# EAGLE board VM_Motor_v2.0 (EAGLE 7.0.0)
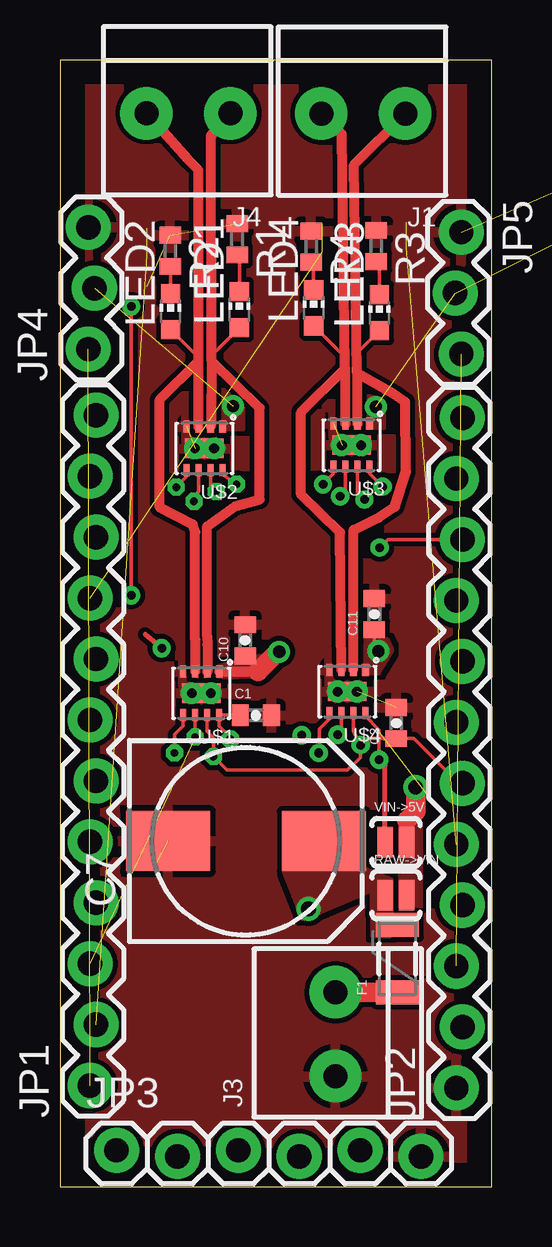
[diagram p0: board, top side]
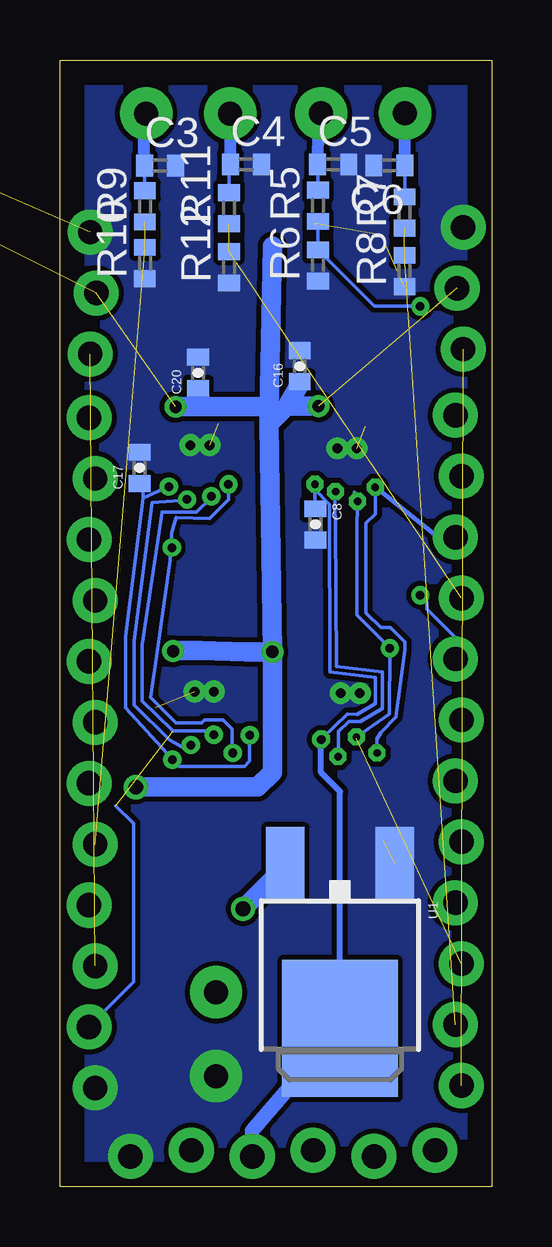
[diagram p1: board, bottom side, seen from below]

Size 18 x 46.97 mm. Coordinates in mm from the lower left corner, seen from the top.
Outline: 0,0 18,0 18,46.97 0,46.97 0,0
Copper layers (1*16): Top 0.035mm / dielectric 1.5mm / Bottom 0.035mm
Design rules "default": minimum track width 10mil, minimum drill 24mil, track to track 8mil, track to pad 8mil, pad to pad 8mil, via to via 8mil, smd to smd 8mil, copper to edge 40mil, drill to drill 8mil, minimum pad ring 10mil, minimum via ring 8mil, stop-mask expansion 4mil, vias tented up to drill 0mil, thermal gap 10mil

## Footprints (pad centres in the part's own frame; a part is rotated, then mirrored left to right if it is on the bottom)
0402-CAP = smd 0.7 x 0.9: 1 -0.65,0; 2 0.65,0
C0402 = smd 0.7 x 0.9: 1 -0.65,0; 2 0.65,0
150CLZ-0810 = smd 3.5 x 2.5: + 3.25,0; - -3.25,0
PTC-1206 = smd 1 x 1.8: 1 -1.4,0; 2 1.4,0
TERMBLOCK_1X2-3.5MM = drill 1 pad 2.184: 1 1.8,0; 2 -1.7,0
1X12_LOCK = drill 1.016 pad 1.88: 1 0,0.127; 2 2.54,-0.127; 3 5.08,0.127; 4 7.62,-0.127; 5 10.16,0.127; 6 12.7,-0.127; 7 15.24,0.127; 8 17.78,-0.127; 9 20.32,0.127; 10 22.86,-0.127; 11 25.4,0.127; 12 27.94,-0.127
1X06_LOCK = drill 1.016 pad 1.88: 1 0,0; 2 2.54,-0.254; 3 5.08,0; 4 7.62,-0.254; 5 10.16,0; 6 12.7,-0.254
1X03_LOCK = drill 1.016 pad 1.88: 1 0,0.127; 2 2.54,-0.127; 3 5.08,0.127
CHIP-LED0603 = smd 0.8 x 0.8: A 0,-0.75; C 0,0.75
R0402 = smd 0.7 x 0.9: 1 -0.65,0; 2 0.65,0
SJ_2S-NO = smd 0.635 x 1.27: 1 -0.45,0; 2 0.45,0
DPAK = smd 1.6 x 3: 1 -2.28,-5.31; 3 2.28,-5.31 | smd 4.826 x 5.715: 4 0,1.588
QFN8 = smd 0.28 x 0.5: P$1 -0.75,-0.9; P$2 -0.25,-0.9 | smd 0.25 x 0.5: P$3 0.25,-0.9; P$4 0.75,-0.9; P$5 0.75,0.9; P$6 0.25,0.9; P$7 -0.25,0.9; P$8 -0.75,0.9 | smd 1.6 x 0.8: P$9 0,0 | drill 0.4 pad 0.6: P$10 0.4,0; P$11 -0.4,0

## Placement (x,y rotation side)
C1  .1uF  [0402-CAP]  8.17,19.65 0 top
C2  .1uF  [0402-CAP]  14.03,19.32 90 top
C3  100nF  [C0402]  13.82,42.57 0 bottom
C4  100nF  [C0402]  10.24,42.62 0 bottom
C5  100nF  [C0402]  6.61,42.62 0 bottom
C6  100nF  [C0402]  4.26,42.58 180 bottom
C7  1000uF  [150CLZ-0810]  7.75,14.41 0 top
C8  .1uF  [0402-CAP]  7.35,27.61 270 bottom
C10  10uF  [0402-CAP]  7.73,22.78 90 top
C11  10uF  [0402-CAP]  13.11,23.87 90 top
C13  10uF  [0402-CAP]  33.99,50.44 90 top  (outside the outline)
C14  10uF  [0402-CAP]  33.99,46.63 90 top  (outside the outline)
C16  10uF  [0402-CAP]  8,34.21 90 bottom
C17  .1uF  [0402-CAP]  14.68,29.97 90 bottom
C20  10uF  [0402-CAP]  12.24,33.93 90 bottom
F1  PTCSMD  [PTC-1206]  14.07,9.51 90 top
J1  [TERMBLOCK_1X2-3.5MM]  12.7,44.74 180 top
J3  [TERMBLOCK_1X2-3.5MM]  11.49,6.31 90 top
J4  [TERMBLOCK_1X2-3.5MM]  5.41,44.75 180 top
JP1  M12LOCK  [1X12_LOCK]  1.38,4.22 90 top
JP2  M12LOCK  [1X12_LOCK]  16.66,4.12 90 top
JP3  [1X06_LOCK]  2.36,1.52 0 top
JP4  [1X03_LOCK]  1.31,34.92 90 top
JP5  [1X03_LOCK]  16.61,39.8 270 top
LED1  BLUE  [CHIP-LED0603]  7.48,36.56 0 top
LED2  GREEN  [CHIP-LED0603]  4.61,36.49 0 top
LED3  BLUE  [CHIP-LED0603]  13.32,36.44 0 top
LED4  GREEN  [CHIP-LED0603]  10.58,36.64 0 top
R1  [R0402]  7.39,39.5 270 top
R2  [R0402]  4.6,39.01 270 top
R3  [R0402]  13.19,39.22 270 top
R4  [R0402]  10.48,39.19 270 top
R5  [R0402]  7.24,40.89 90 bottom
R6  [R0402]  7.24,38.4 90 bottom
R7  [R0402]  3.63,40.61 90 bottom
R8  [R0402]  3.63,38.18 90 bottom
R9  [R0402]  14.45,40.87 90 bottom
R10  [R0402]  14.45,38.51 90 bottom
R11  [R0402]  10.95,40.79 90 bottom
R12  [R0402]  10.95,38.33 90 bottom
RAW->VIN  SOLDERJUMPERNO  [SJ_2S-NO]  14.01,12.16 0 top
U1  V_REG_MC33269DT  [DPAK]  6.32,8.19 180 bottom
U$1  DRV8837  [QFN8]  5.89,20.57 180 top
U$2  DRV8837  [QFN8]  6.03,30.78 180 top
U$3  DRV8837  [QFN8]  12.16,30.91 180 top
U$4  DRV8837  [QFN8]  11.99,20.64 180 top
VIN->5V  SOLDERJUMPERNO  [SJ_2S-NO]  14.01,14.36 0 top

## Library data of the parts
C1 C2 C8 C10 C11 C13 C14 C16 C17 C20 = SparkFun-Capacitors
C3-C7 R1-R12 = resistor
F1 = SparkFun-PowerIC; PROD_ID: RES-11150
J1 J3 J4 = microbuilder
JP1-JP5 = SparkFun-Connectors
LED1-LED4 = led
RAW->VIN VIN->5V = SparkFun-Retired
U1 = SparkFun-PowerIC
U$1-U$4 = bt_motordriver

## Nets
+5V: C1.1 C2.1 C8.1 C17.1 JP3.4 U1.4 U$1.P$8 U$2.P$8 U$3.P$8 U$4.P$8 VIN->5V.1
CTS_RES: JP3.5
DTR_SEL: JP3.1
GND: C1.2 C2.2 C3.2 C4.2 C5.2 C6.2 C7.- C8.2 C10.2 C11.2 C13.2 C14.2 C16.2 C17.2 C20.2 J3.2 JP2.1 JP3.6 JP4.3 JP5.1 R1.1 R2.1 R3.1 R4.1 R6.1 R8.1 R10.1 R12.1 U1.1 U$1.P$4 U$1.P$9 U$1.P$10 U$1.P$11 U$2.P$4 U$2.P$9 U$2.P$10 U$2.P$11 U$3.P$4 U$3.P$9 U$3.P$10 U$3.P$11 U$4.P$4 U$4.P$9 U$4.P$10 U$4.P$11
HM-RX: JP2.12
HM-TX: JP2.11
IO20: JP2.8
IO_02: JP2.9
IO_05-SDA: JP1.11
IO_06: JP1.7
IO_07: JP1.6
IO_08: JP1.5
IO_08-SCL: JP1.12
IO_09: JP1.4
IO_10: JP1.8 R5.1 R6.2
IO_011: JP1.1 JP4.1
IO_11: JP1.9 R11.1 R12.2
IO_13: JP2.3 JP5.3
IO_14: JP2.4
IO_15: JP2.7
IO_110: JP1.2 R7.1 R8.2
IO_111: JP2.5 R9.1 R10.2
MOTOR1_DIR: JP1.10 U$1.P$5 U$2.P$5
MOTOR1_PWM: JP1.3 U$1.P$6 U$2.P$6
MOTOR2_DIR: JP2.10 U$3.P$5 U$4.P$5
MOTOR2_PWM: JP2.2 U$3.P$6 U$4.P$6
MOUT1_A: C5.1 J4.2 LED1.A R5.2 U$1.P$2 U$2.P$2
MOUT1_B: C6.1 J4.1 LED2.A R7.2 U$1.P$3 U$2.P$3
MOUT2_A: C3.1 J1.2 LED3.A R9.2 U$3.P$2 U$4.P$2
MOUT2_B: C4.1 J1.1 LED4.A R11.2 U$3.P$3 U$4.P$3
N$1: LED2.C R2.2
N$2: LED4.C R4.2
N$3: LED1.C R1.2
N$4: LED3.C R3.2
N$13: F1.1 J3.1
RAW: C7.+ F1.2 RAW->VIN.1 U1.3
RX: JP3.3
SLEEP: JP2.6 U$1.P$7 U$2.P$7 U$3.P$7 U$4.P$7
TX: JP3.2
VIN: C10.1 C11.1 C13.1 C14.1 C16.1 C20.1 JP4.2 JP5.2 RAW->VIN.2 U$1.P$1 U$2.P$1 U$3.P$1 U$4.P$1 VIN->5V.2

## Tracks (layer width: path | path; a pad name or v marks a point on that pad's centre or on a via)
+5V  (via drill 0.3, 0.36 pad 0.36)
  Top 0.152: v7.09,18.67 7.09,18.77 6.64,19.21 U$1.P$8 7.5,19.68 C1.1 | U$2.P$8 6.78,29.7 v7.37,29.29 | U$4.P$8 12.74,19.62 13.31,19.05 13.31,18.87 | 13.31,18.87 v13.31,17.8 | U$3.P$8 12.91,29.74 v13.46,29.18 | v7.11,18.64 9.91,18.64 v10.08,18.82 | C2.1 13.51,18.68 13.31,18.87
  Top 0.203: VIN->5V.1 13.56,17.55 v13.31,17.8
  Bottom 0.152: 7.09,18.64 v7.09,18.67 6.02,19.71 5.61,19.68 4.85,20.14 4.85,21.23 6.73,21.46 6.76,28.45 7.37,29.06 v7.37,29.29 | v7.37,29.29 7.16,29.29 | v13.31,17.8 13.31,17.98 | 13.46,29.16 v13.46,29.18 14.53,28.7 | 14.53,28.7 15.27,22.96 15.27,19.96 v13.31,17.8 | v10.08,18.82 10.08,17.75 10.31,17.53 13.03,17.53 v13.31,17.8 | v7.37,29.29 7.37,28.98 C8.1 | 14.53,28.7 14.53,29.17 C17.1
  Bottom 0.254: U1.4 6.32,16.48 7.11,17.27 v7.11,18.64 v7.09,18.67
  Bottom 0.61: JP3.4 9.98,2.33 U1.4
GND  (8 unrouted)
  pour Bottom (rank 6, no thermals): 18.1,46.8 18.3,46.8 18.3,-0.9 0.2,-0.9 0.2,47 18.1,47
  pour Top (rank 6): 18.1,46.8 18.3,46.8 18.3,-0.9 0.2,-0.9 0.2,47 18.1,47
IO_10  (via drill 0.36 pad 0.36)
  Top 0.152: v2.97,24.66 v2.97,36.7
  Bottom 0.152: R5.1 R6.2 4.89,36.7 v2.97,36.7 | JP1.8 1.51,22.89 2.69,24.08 2.69,24.38 v2.97,24.66
IO_011  (1 unrouted)
IO_11  (2 unrouted)
IO_13  (1 unrouted)
IO_110  (2 unrouted)
IO_111  (2 unrouted)
MOTOR1_DIR  (via drill 0.3)
  Top 0.152: U$1.P$5 5.14,19.22 4.78,18.85 v4.78,18.09 | U$2.P$5 5.28,29.61 v4.85,29.16
  Bottom 0.152: 4.75,18.06 v4.78,18.09 4.78,18.67 4.62,18.95 3.99,19.58 3.61,22.38 3.61,22.71 4.22,23.32 4.62,23.32 5.23,23.93 5.23,27.66 4.85,28.04 v4.85,29.16
  Bottom 0.203: JP1.10 2.23,27.08 v4.85,29.16
MOTOR1_PWM  (via drill 0.3, 0.36 pad 0.36)  (1 unrouted)
  Top 0.152: U$1.P$6 v5.64,18.75 | U$2.P$6 5.78,28.99 v5.59,28.57
  Top 0.203: v4.24,22.45 3.56,23.02
  Bottom 0.152: 5.64,18.69 v5.64,18.75 4.27,19.71 v4.24,22.45 5.61,23.82 5.61,27.84 5.59,28.02 v5.59,28.57 5.71,28.96
MOTOR2_DIR  (via drill 0.36 pad 0.36)
  Top 0.152: U$4.P$5 11.24,19.49 10.82,19.07 10.82,18.11 v10.79,18.09 | U$3.P$5 11.41,29.72 v10.97,29.29 | JP2.10 13.67,26.98 v13.34,26.64
  Bottom 0.152: v10.97,29.29 10.97,28.65 11.76,27.86 13.16,27.89 13.34,27.25 v13.34,26.64 13.41,26.57 13.41,26.11 13.92,22.43 14.22,20.4 13.16,19.33 12.09,19.33 11.96,19.46 11.2,19.46 10.82,19.07 10.82,18.11 v10.79,18.09
MOTOR2_PWM  (via drill 0.36 pad 0.36)  (1 unrouted)
  Top 0.152: U$4.P$6 11.74,19 v11.58,18.85 | U$3.P$6 11.91,29 v11.68,28.78
  Bottom 0.152: 11.58,18.8 v11.58,18.85 11.89,19 13.28,19 14.58,20.24 14.58,22.58 13.74,28.12 12.29,28.12 11.68,28.73 11.63,28.73 v11.68,28.78 | JP2.2 16.79,6.68 14.94,8.53 14.94,15.14 15.67,15.88
MOUT1_A
  Top 0.152: 6.3,31.7 U$2.P$2 | U$1.P$2 | 6.33,34.42 6.33,34.66 LED1.A
  Top 0.406: 6.33,34.42 8.33,32.46 8.33,28.65 7.32,28.37 6.14,27.53 6.14,22.93 6.15,22.61 U$1.P$2 | 6.33,34.42 6.3,31.7 | 6.33,34.42 6.3,43.81 J4.2
  Bottom 0.152: R5.2 7.24,42.6 C5.1
  Bottom 0.406: 7.17,44.69 J4.2
  Bottom 0.508: C5.1 7.17,44.69
  pour Top (no thermals): 5.99,21.21 5.99,22.43 6.3,22.43 6.3,21.21
MOUT1_B
  Top 0.152: 5.64,21.48 U$1.P$3 | 5.78,34.42 5.78,34.57 LED2.A
  Top 0.406: J4.1 5.33,42.82 5.78,42.38 5.78,34.42 | 5.64,21.48 5.64,22.58 5.64,22.8 5.64,27.29 5.54,27.61 4.17,28.32 4.17,32.81 5.78,34.42 | U$2.P$3 5.78,34.42
  Bottom 0.152: C6.1 3.61,41.28 R7.2
  Bottom 0.406: 3.64,44.72 J4.1
  Bottom 0.508: C6.1 3.64,44.72
  pour Top (no thermals): 5.49,21.21 5.49,22.43 5.79,22.43 5.82,21.21
MOUT2_A
  Top 0.152: 12.39,33.91 12.39,34.76 LED3.A
  Top 0.406: U$4.P$2 12.24,22.91 12.24,27.38 13.28,27.89 13.97,28.35 14.43,29.79 14.4,32.72 13.92,33.05 12.39,33.91 | 12.39,33.91 12.39,31.83 U$3.P$2 | 12.39,33.91 12.27,42.6 J1.2
  Bottom 0.152: C3.1 14.47,41.54 R9.2
  Bottom 0.406: 14.51,44.63 J1.2
  Bottom 0.508: C3.1 14.51,44.63
MOUT2_B
  Top 0.152: 11.89,34.11 11.89,34.58 LED4.A
  Top 0.406: U$4.P$3 11.69,27.28 10.06,28.85 10.06,32.28 11.89,34.11 | 11.89,34.11 11.89,31.83 U$3.P$3 | 11.89,34.11 11.76,43.88 J1.1
  Bottom 0.152: R11.2 10.95,42.56 C4.1
  Bottom 0.406: J1.1
  Bottom 0.508: C4.1 J1.1
N$1
  Top 0.152: LED2.C R2.2
N$2
  Top 0.152: LED4.C 10.58,38.44 R4.2
N$3
  Top 0.152: LED1.C 7.48,38.75 R1.2
N$4
  Top 0.152: LED3.C 13.32,38.43 R3.2
N$13
  Top 0.813: J3.1 F1.1
RAW  (via drill 0.61 pad 0.61)
  Bottom 0.254: U1.3 8.6,13.35
  Bottom 0.813: 8.6,13.35 v10.36,11.58
  pour Top (no thermals): 13.82,10.49 13.82,12.8 12.95,13.13 12.8,13.21 9.32,13.21 10.13,11.18 13,12.4 13.03,10.49
SLEEP  (via drill 0.3, 0.36 pad 0.36)
  Top 0.152: U$1.P$7 6.14,18.98 6.4,18.72 v6.4,17.93 6.96,17.37 11.99,17.37 12.52,17.91 12.52,18.39 v12.55,18.41 | U$2.P$7 6.28,29.26 v6.5,28.98 | U$4.P$7 12.24,18.98 v12.55,18.41 | U$3.P$7 12.41,28.94 v12.7,28.65 | JP2.6 16.63,16.82 14.76,18.69 12.83,18.69 v12.55,18.41
  Bottom 0.152: 6.4,17.91 v6.4,17.93 6.38,17.96 6.38,18.97 5.94,19.41 5.46,19.41 4.55,19.94 4.55,21.46 6.48,21.69 6.5,27.66 6.53,28.3 6.53,28.93 v6.5,28.98 | 12.42,18.69 v12.55,18.41 12.72,18.24 13.44,18.62 14.91,20.09 14.91,22.76 14.15,28.52 12.7,28.63 v12.7,28.65
VIN  (via drill 0.51 pad 0.51, 0.61 pad 0.61)  (4 unrouted)
  Top 0.152: C11.1 13.11,22.5 v13.28,22.33
  Top 0.406: U$1.P$1 8.27,21.48 | 9.14,22.25 v9.14,22.3 9.14,22.35
  Top 0.508: VIN->5V.2 14.46,15.27
  Top 0.813: 14.46,15.27 14.83,15.65 v14.83,16.66 | 8.27,21.48 9.14,22.35
  Bottom 0.152: 9.45,32.51 9.27,32.33 | v13.18,32.51 13.01,32.51 C20.1
  Bottom 0.406: 8.03,33.39 C16.1
  Bottom 0.813: v14.83,16.66 9.75,16.66 9.14,17.27 v9.14,22.3 | v9.14,22.3 9.27,31.8 | 9.27,31.8 9.27,32.33 9.14,39.22 | v7.21,32.54 8.53,32.54 | 8.53,32.54 9.27,31.8 | v9.14,22.3 10.21,22.3 12.17,22.35 12.98,22.35 v13.28,22.33 | v13.18,32.51 9.45,32.51 | 8.53,32.54 8.03,33.39
  pour Top (no thermals): 14.22,10.36 14.22,15.04 15.04,15.04 15.04,10.36
  pour Top (no thermals): 6.83,31.6 7.65,31.6 7.65,32.61 6.83,33.43
  pour Top (no thermals): 8.36,21.29 8.41,22.12 6.58,21.67 6.55,21.26
  pour Top (no thermals): 12.67,21.44 13.28,21.41 13.87,22.38 13.67,22.78 12.75,22.78
  pour Top (no thermals): 12.8,31.67 13.51,31.65 13.49,32.79 12.78,32.97